# Altium PCB IntegroDiferencial_PCB.PcbDoc
Units mm, origin at the board's own origin, x right, y up, seen from the top; angles counter-clockwise.
Board outline 49.78 x 42.82 mm, 2 copper layers (Top Layer, Bottom Layer); 28 components, 14 nets, 64 pads, 0 vias.
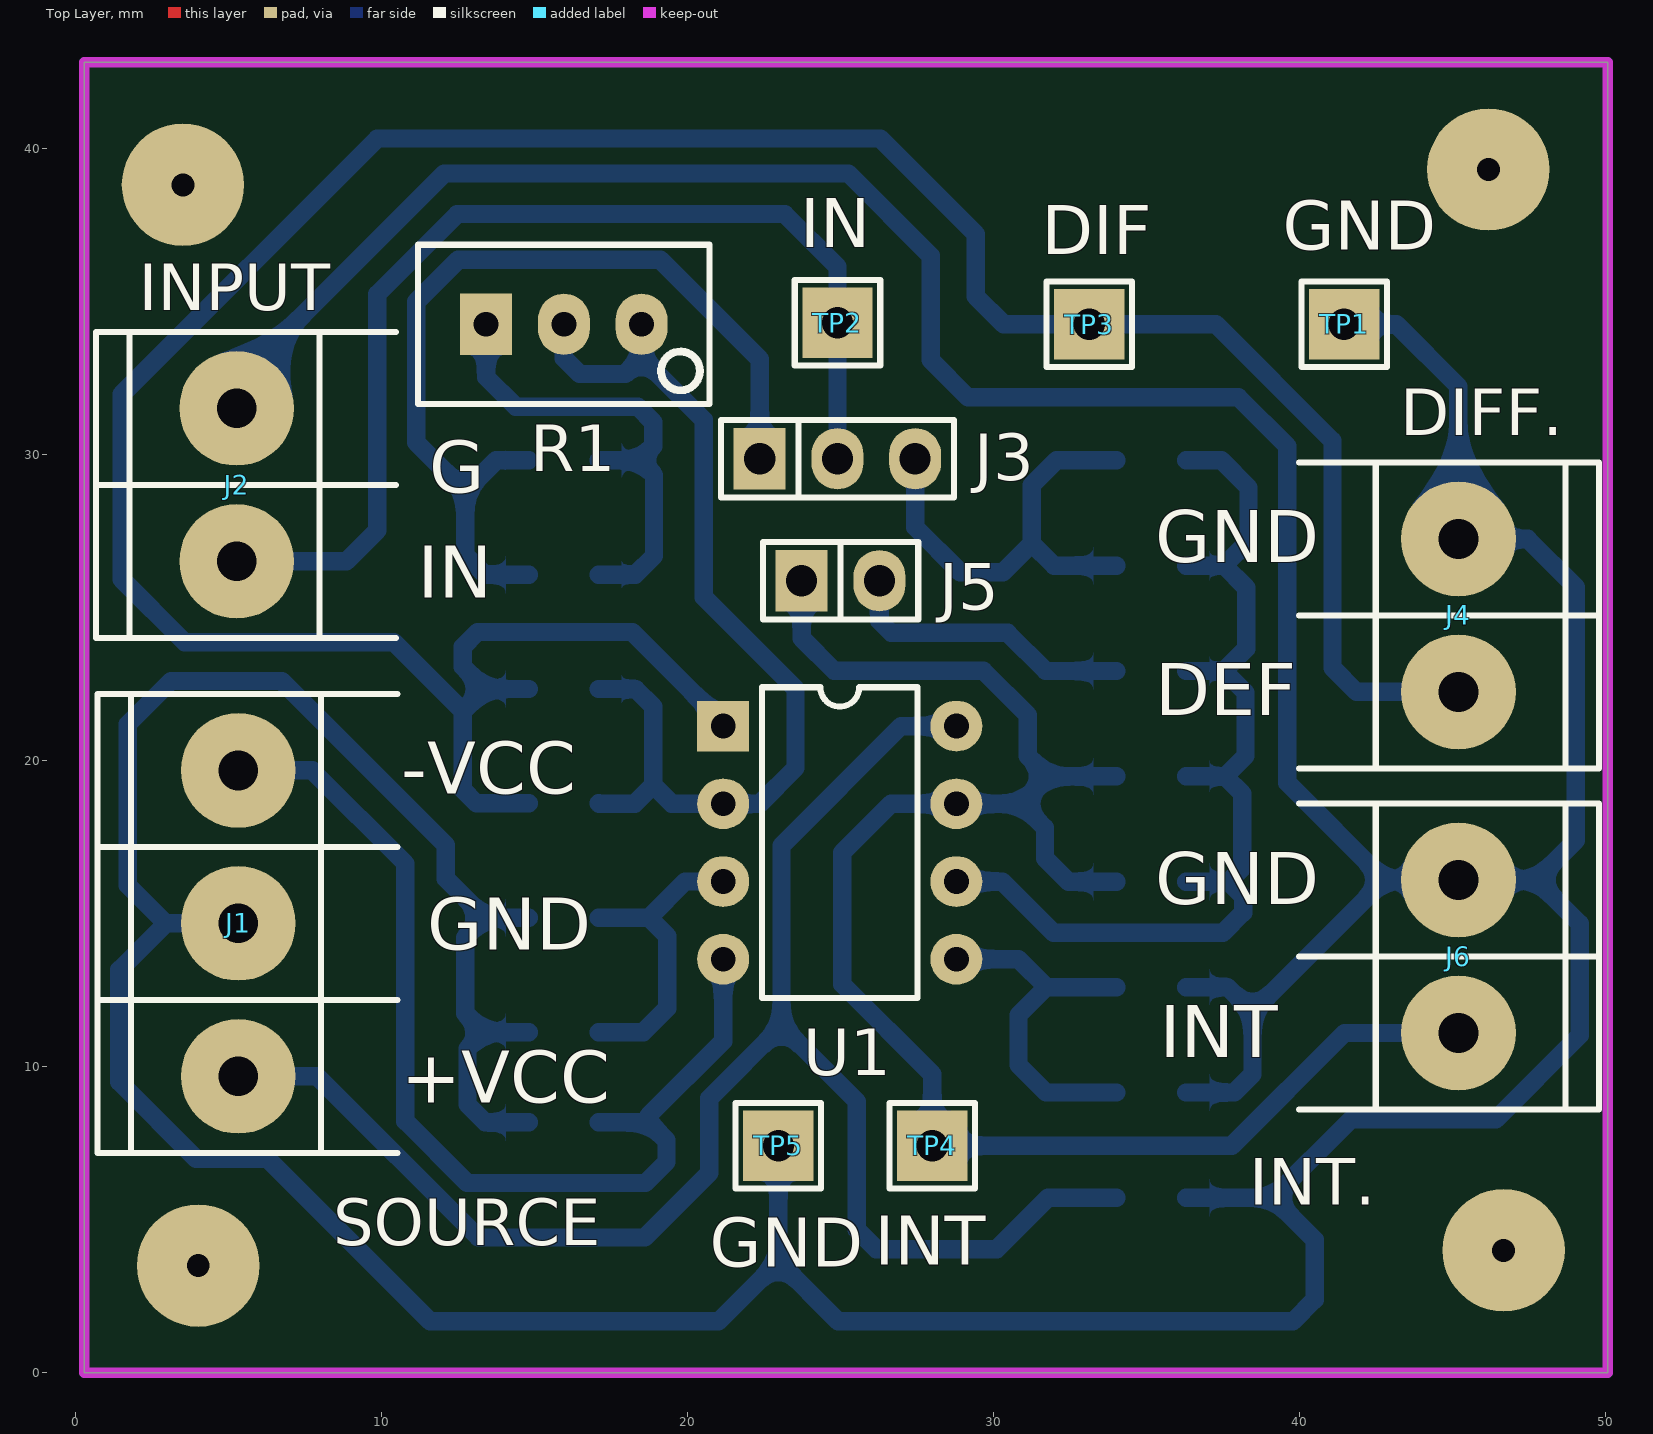
[diagram p0: Top Layer view]
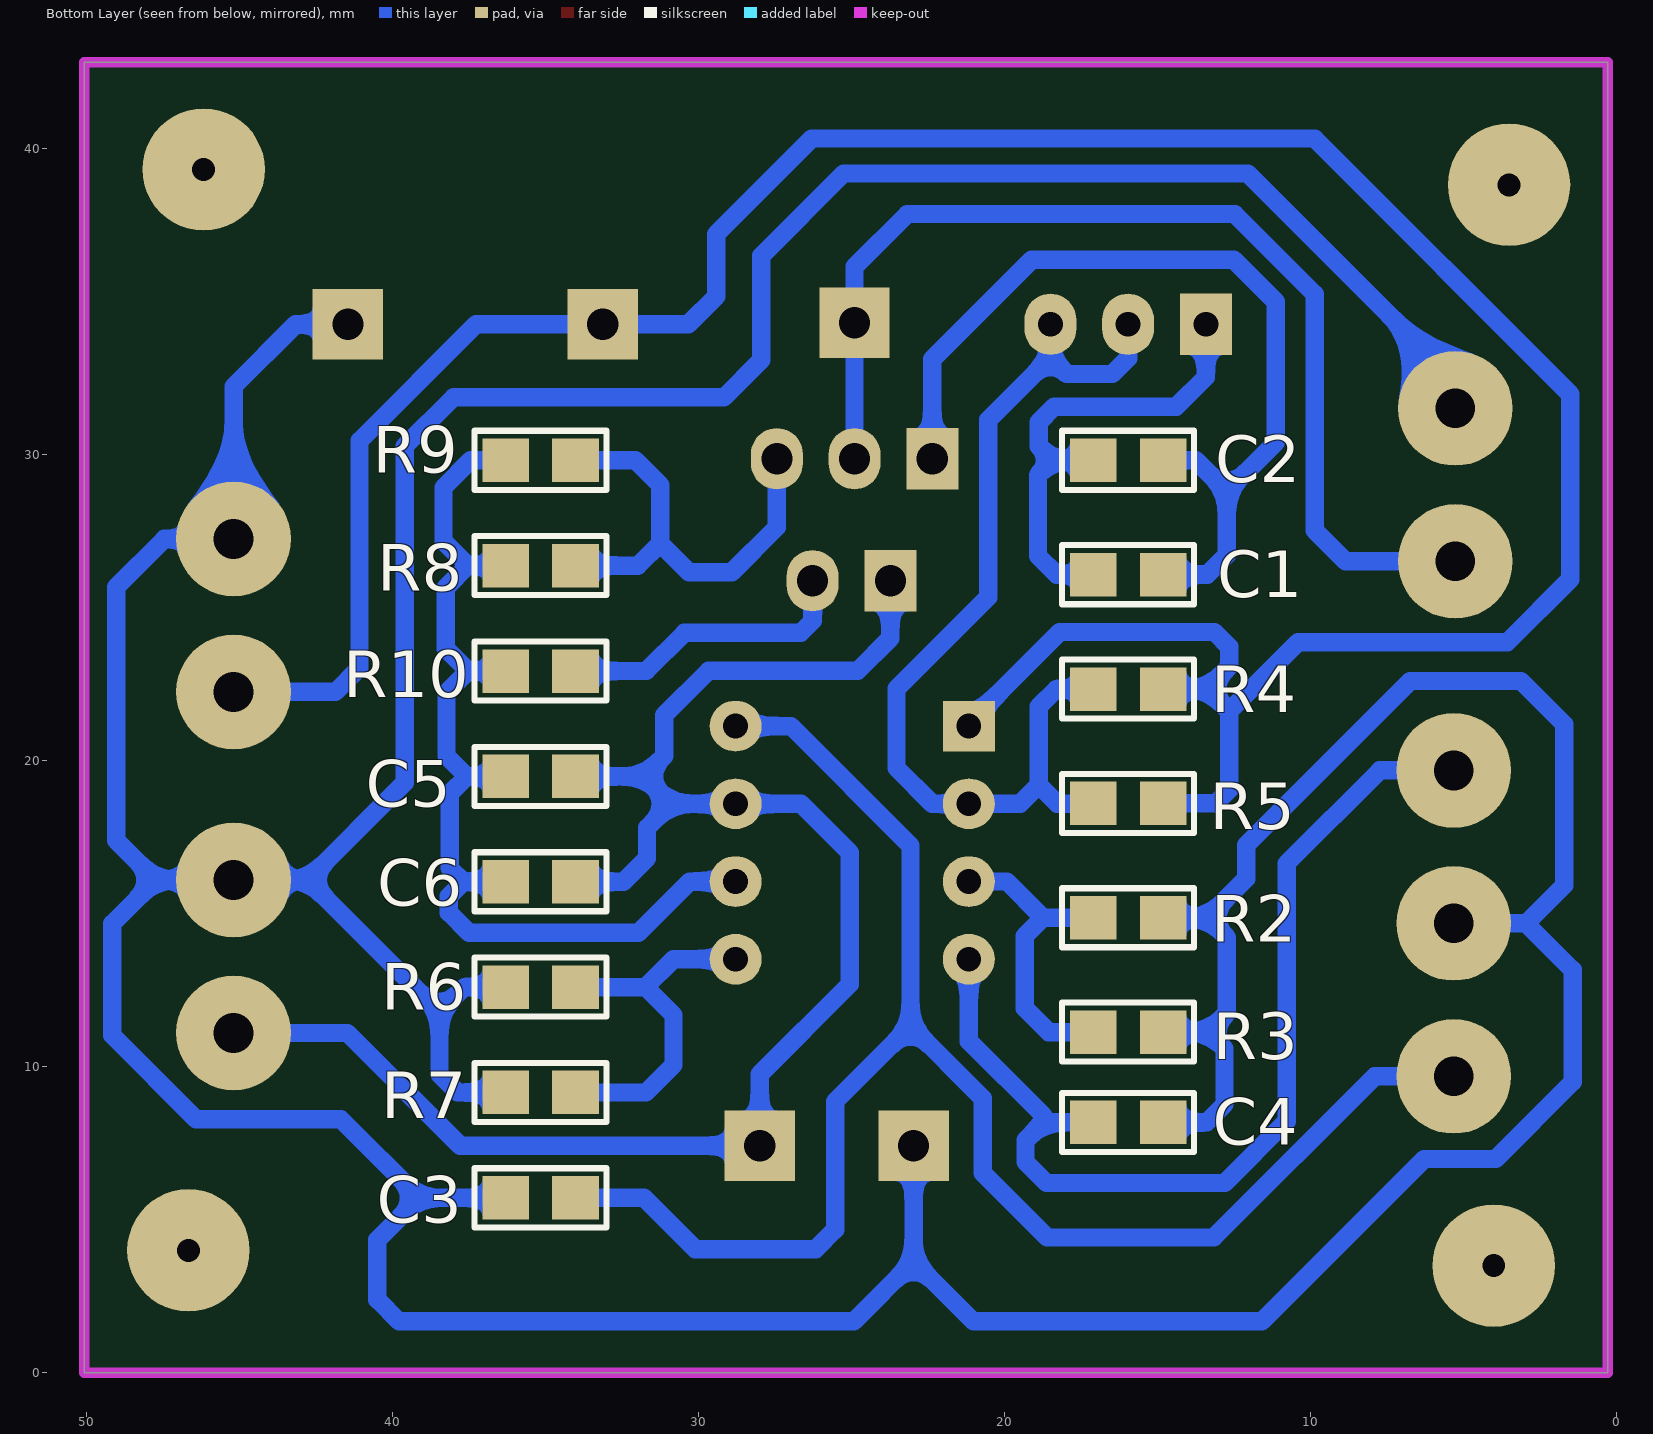
[diagram p1: Bottom Layer view, seen from below]
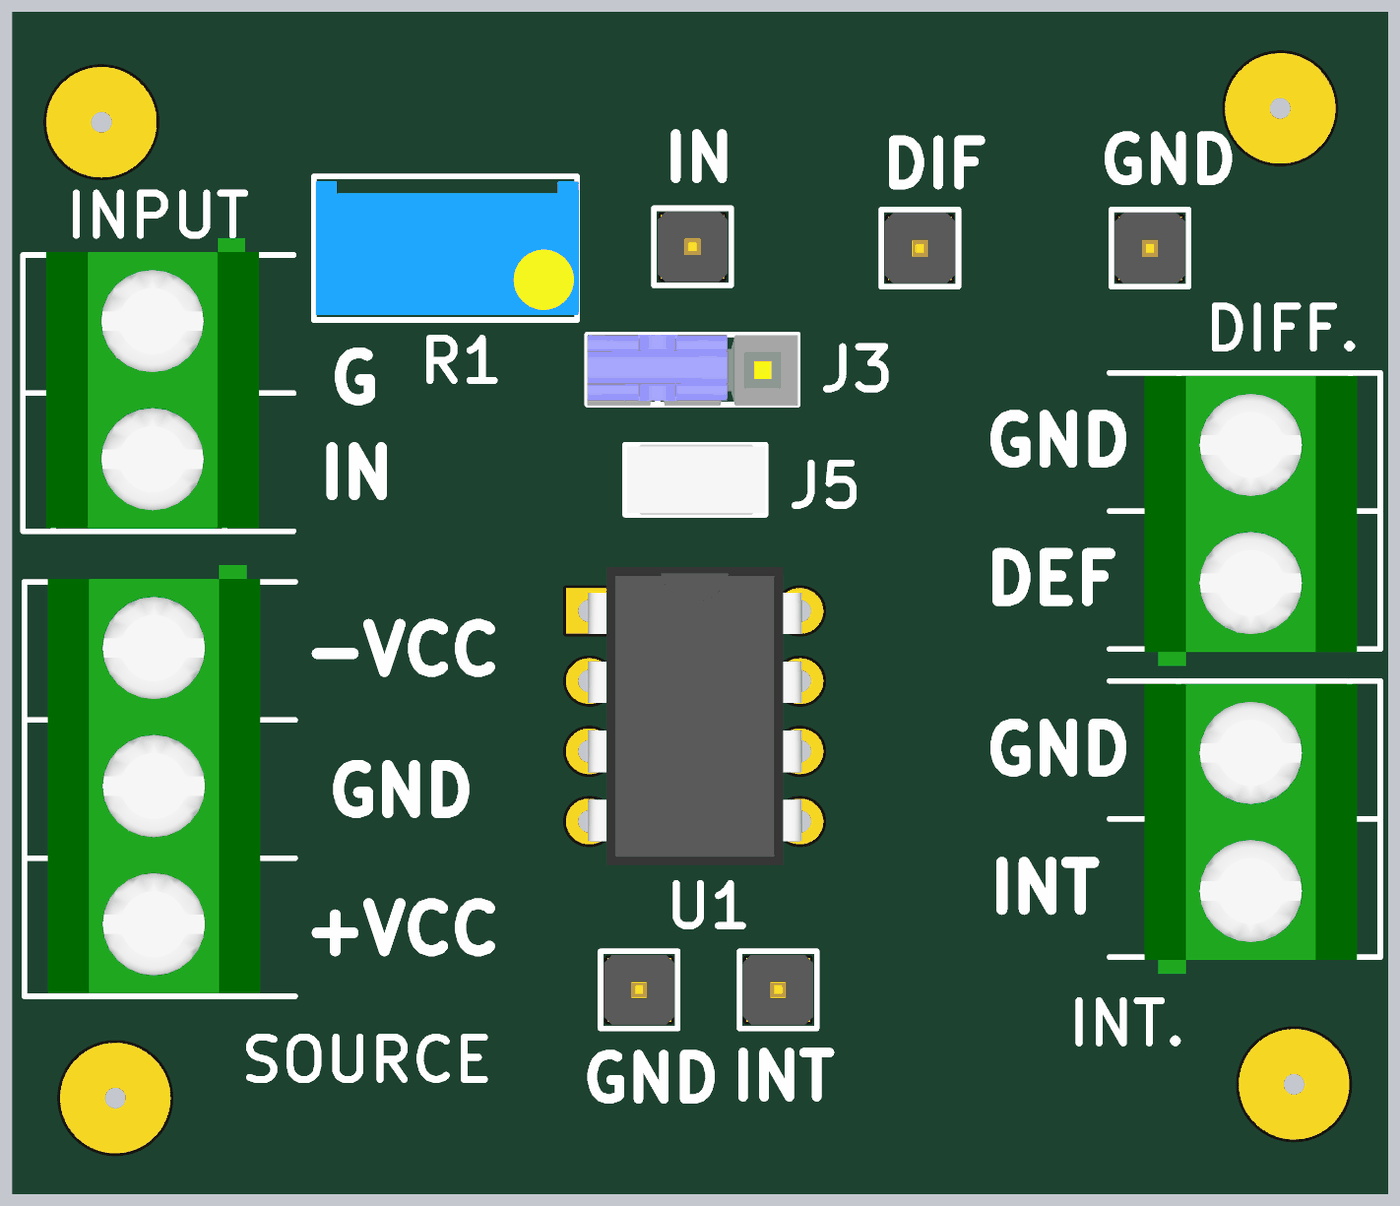
[diagram p2: 3D render of the assembled board from above, using the file's embedded part models]
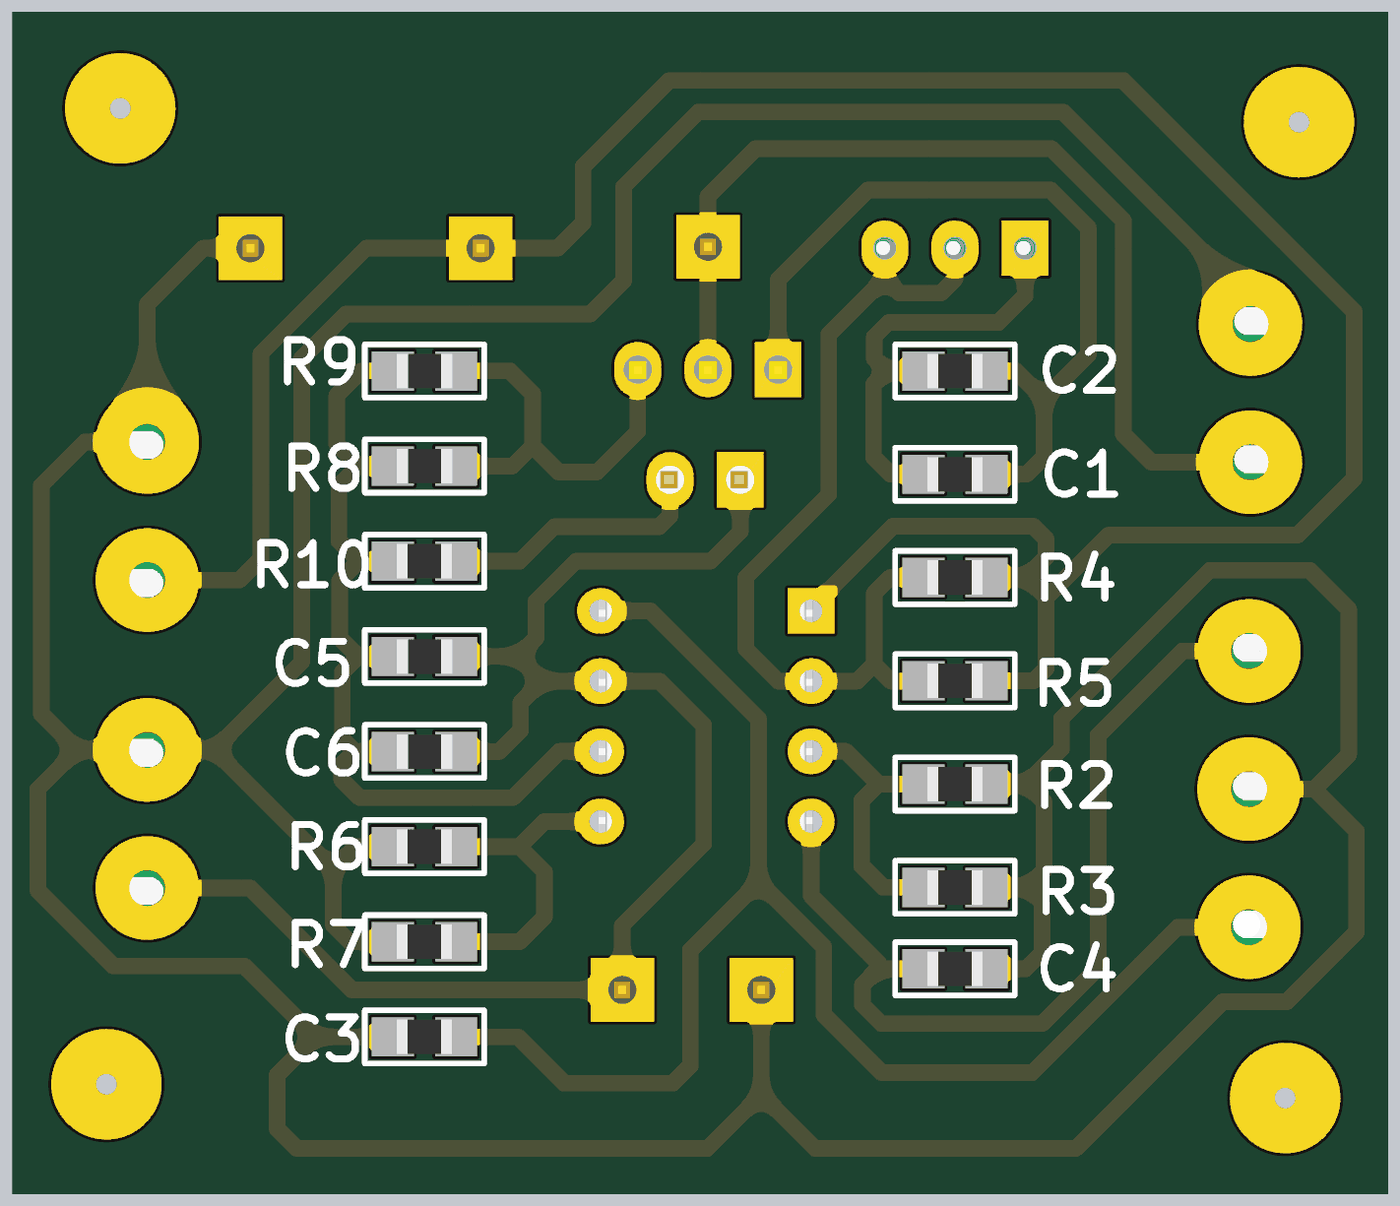
[diagram p3: 3D render of the assembled board from below, using the file's embedded part models]

## Layer stack, top to bottom
Top Solder: solder mask 0.0102, Solder Resist, Dk 3.5
Top Layer: signal copper 0.0356
Dielectric 1: dielectric 0.32, FR-4, Dk 4.8
Bottom Layer: signal copper 0.0356
Bottom Solder: solder mask 0.0102, Solder Resist, Dk 3.5

## Board outline
0.279,0 50.063,0 50.063,42.824 0.279,42.824

## Design rules (kind name [scope] priority, off if disabled: settings)
Clearance Polygon [InPolygon] p1: gap=1
Clearance [All] p2: gap=0.4
PolygonConnect [All] p1: connectstyle=Relief reliefconductorwidth=0.254 reliefentries=4 polygonreliefangle="90 Angle" airgapwidth=0.254
RoutingVias [All] p1: holewidth=0.711 width=1.27 viastyle="Through Hole" minholewidth=0.711 minwidth=1.27 maxholewidth=0.711 maxwidth=1.27
SolderMaskExpansion [All] p1: expansion=0.102
Width [All] p1: maxlimit=0.9 minlimit=0.6 preferedwidth=0.6
30 further rules are at their usual default settings.

## Components (designator, comment, footprint, x,y, rotation, side; value= is the part's Value field where it differs from the comment)
C1 "10nF" 0805 15.951,26.082 r0 bottom
C2 "10nF" 0805 15.951,29.82 r0 bottom
C3 "100nF" 0805 35.154,5.715 r180 bottom
C4 "100nF" 0805 15.951,8.179 r0 bottom
C5 "10nF" 0805 35.154,19.489 r0 bottom
C6 "10nF" 0805 35.154,16.046 r0 bottom
J1 "SOURCE" BORNERA3 5.309,14.685 r0 top
J2 "INPUT" BORNERA2 5.258,29.018 r0 top
J3 "SELECTION" JUMPER3 24.892,29.87 r0 top
J4 "DIFF." BORNERA2 45.187,24.75 r180 top
J5 "COMPENSATION" JUMPER2 24.994,25.883 r0 top
J6 "INT." BORNERA2 45.187,13.604 r180 top
R1 "PRESET 500R" "PRESET V" 15.951,34.265 r0 top
R2 "10kR" 0805 15.951,14.867 r0 bottom
R3 "10kR" 0805 15.951,11.129 r0 bottom
R4 "10kR" 0805 15.951,22.344 r0 bottom
R5 "10kR" 0805 15.951,18.605 r0 bottom
R6 "10kR" 0805 35.154,12.602 r180 bottom
R7 "10kR" 0805 35.154,9.159 r180 bottom
R8 "10kR" 0805 35.154,26.376 r0 bottom
R9 "10kR" 0805 35.154,29.82 r0 bottom
R10 "470kR" 0805 35.154,22.933 r180 bottom
TP1 "GND" TPTH 41.453,34.265 r0 top
TP2 "IN" TPTH 24.892,34.315 r0 top
TP3 "DIF" TPTH 33.122,34.265 r0 top
TP4 "INT" TPTH 27.991,7.417 r0 top
TP5 "GND" TPTH 22.962,7.417 r0 top
U1 "LM833" DIP8 21.158,21.133 r0 top

## Footprints (in the part's own frame and the unit in brackets; to place one, negate y for a bottom-side part, rotate by r counter-clockwise, add the part's x,y. Pads: shape width x height; smd on the part's side, far side on the other; paste and mask are expansions set on the pad)
0805 [mil] "Pasivo 0805"
  rect 60x56 smd: 1(-45,0) 2(45,0)
  silkscreen extent -85,-38 85,38, body extent -39,-25 39,25, height 15
BORNERA2 [mm] "Bornera con Tornillos 5mm separación"
  round 3.75 hole 1.3: 1(0,2.5) 2(0,-2.5)
  silkscreen extent -4.6,-5 5.2,5, body extent -3.76,-4.89 3.94,5.61, height 10
BORNERA3 [mm] "Bornera con Tornillos 5mm separación"
  round 3.75 hole 1.3: 1(0,5) 2(0,0) 3(0,-5)
  silkscreen extent -4.6,-7.5 5.2,7.5, body extent -3.76,-7.39 3.94,8.11, height 10.05
DIP8 [mm]
  rect 1.7x1.65 hole 0.813: 1(0,0)
  oval 1.7x1.65 hole 0.813: 2(0,-2.54) 3(0,-5.08) 4(0,-7.62) 5(7.62,-7.62) 6(7.62,-5.08) 7(7.62,-2.54) 8(7.62,0)
  silkscreen extent 1.27,-8.89 6.35,1.27, body extent -0.06,-9.21 7.7,1.59, height 4.5
JUMPER2 [mm]
  rect 1.7x2 hole 1.016: 1(-1.27,0)
  oval 1.7x2 hole 1.016: 2(1.27,0)
  silkscreen extent -2.54,-1.27 2.54,1.27, body extent -2.46,-1.27 2.54,1.27, height 9.5
JUMPER3 [mm]
  rect 1.7x2 hole 1.016: 1(-2.54,0)
  oval 1.7x2 hole 1.016: 2(0,0) 3(2.54,0)
  silkscreen extent -3.81,-1.27 3.81,1.27, body extent -3.81,-1.3 3.81,1.27, height 16.15
"PRESET V" [mm]
  rect 1.7x2 hole 0.813: 1(-2.54,0)
  oval 1.7x2 hole 0.813: 2(0,0) 3(2.54,0)
  silkscreen extent -4.76,-2.6 4.76,2.6, body extent -4.7,-2.42 4.83,2.42, height 11.55
TPTH [mm]
  rect 2.3x2.3 hole 1.016: 1(0,0)
  silkscreen extent -1.4,-1.4 1.4,1.4, body extent -1.27,-1.27 1.27,1.27, height 6.04

## Part data
C1 C2 C5 C6: library part CAP, "CAP 10nF 0805"
C3 C4: library part CAP, "CAP 100nF 0805"
J1: library part "BORNERA 3", "BORNERA 3"
J2 J4 J6: library part "BORNERA 2", "BORNERA 2"
J3: library part JUMPER3, "JUMPER"
J5: library part JUMPER, "JUMPER"
R1: library part PRESET
R2 R3 R4 R5 R6 R7 R8 R9: library part RES, "RES 10kR 0805"
R10: library part RES, "RES 470kR 0805"
TP1 TP2 TP3 TP4 TP5: library part TP
U1: "Dual Audio Operational Amplifier"

## Free pads (board coordinates)
  round 4 hole 0.75: 2(3.5,38.824) 2(4,3.5) 2(46.165,39.324) 2(46.665,4)

## Nets (pads, with @x,y where several pads share a name; then routed paths per layer and width w, separated by ;. In a path a pad name is that pad's centre, name@x,y a point inside that pad or via, vN(x,y) a via of type N, cw(c..) or ccw(c..) an arc to the next point about the centre after c; other vN are vias at no path point)
DIFFERENTIATOR_INPUT: C1.1 C2.1 J3.1 | length 30.2
  Bottom Layer w0.6: C1.1 13.365,26.082 12.725,26.721 12.725,28.804 ; C2.1 13.741,29.82 12.725,28.804 ; J3.1 22.352,33.122 19.101,36.373 12.497,36.373 11.125,35.001 11.125,30.404 12.725,28.804
GND: C3.1 C4.1 J1.2 J2.1 J4.2 J6.2 R2.1 R3.1 R6.1 R7.1 TP1.1 TP5.1 | length 217.3
  Bottom Layer w0.6: J2.1 5.258,32.41 12.04,39.192 25.248,39.192 27.94,36.5 27.94,33.096 29.159,31.877 37.998,31.877 39.599,30.277 39.599,19.279 42.774,16.104 ; J1.2 2.943,14.685 ; C4.1 13.386,8.179 12.802,8.763 12.802,10.592 13.339,11.129 ; R3.1 13.339,11.129 ; R2.1 13.369,14.867 ; TP5.1 22.962,3.632 ; C3.1 39.116,5.715 ; R7.1 37.861,9.159 38.456,9.754 38.456,11.786 ; R6.1 37.639,12.602 38.456,11.786 ; TP1.1 43.155,34.265 45.187,32.233 J4.2 47.451,27.25 49.022,25.679 49.022,17.399 47.727,16.104 ; 2.943,14.685 1.702,15.926 1.702,21.195 3.113,22.606 6.731,22.606 12.09,17.247 12.09,16.146 13.369,14.867 ; 2.943,14.685 1.422,13.165 1.422,9.5 3.937,6.985 6.274,6.985 11.582,1.676 21.006,1.676 22.962,3.632 ; 13.339,11.129 12.725,11.743 12.725,14.224 13.369,14.867 ; 22.962,3.632 24.917,1.676 39.776,1.676 40.488,2.388 40.488,4.343 39.116,5.715 ; 38.456,11.786 42.774,16.104 ; 39.116,5.715 41.681,8.28 46.406,8.28 49.149,11.024 49.149,14.681 47.727,16.104 ; 42.774,16.104 J6.2 47.727,16.104
INPUT_SIGNAL: J2.2 J3.2 TP2.1 | length 35.8
  Bottom Layer w0.6: J2.2 8.839,26.518 9.855,27.534 9.855,35.255 12.471,37.871 23.165,37.871 24.892,36.144 TP2.1 J3.2
INTEGRATOR_INPUT: J3.3 R8.1 R9.1 | length 15.1
  Bottom Layer w0.6: J3.3 27.432,27.635 28.905,26.162 30.302,26.162 31.242,27.102 ; R8.1 31.968,26.376 31.242,27.102 ; R9.1 32.055,29.82 31.242,29.007 31.242,27.102
NetC1_2: C1.2 C2.2 R1.1 | length 15.9
  Bottom Layer w0.6: R1.1 13.411,32.537 14.376,31.572 18.364,31.572 18.872,31.064 18.872,30.277 18.415,29.82 ; C1.2 18.284,26.082 18.898,26.695 18.898,29.337 18.415,29.82 ; C2.2 18.415,29.82
NetC5_2: C5.2 C6.2 R8.2 R9.2 R10.1 U1.6 | length 33.9
  Bottom Layer w0.6: U1.6 30.277,16.053 31.953,14.376 37.49,14.376 38.151,15.037 38.151,15.57 37.675,16.046 ; C6.2 37.675,16.046 ; C5.2 37.559,19.489 ; R10.1 37.519,22.933 ; R8.2 37.53,26.376 ; R9.2 37.44,29.82 38.329,28.931 38.329,27.174 37.53,26.376 ; 37.519,22.933 38.252,23.666 38.252,25.654 37.53,26.376 ; 37.519,22.933 38.227,22.225 38.227,20.157 37.559,19.489 ; 37.559,19.489 38.125,18.923 38.125,16.495 37.675,16.046
NetJ5_2: J5.2 R10.2 | length 9.7
  Bottom Layer w0.6: J5.2 26.264,24.571 26.654,24.181 30.455,24.181 31.703,22.933 R10.2
NetR1_2: R1.2 R1.3 R4.2 R5.2 U1.2 | length 32.7
  Bottom Layer w0.6: R1.2 15.951,33.156 16.469,32.639 17.958,32.639 18.491,33.172 ; R5.2 17.107,18.593 18.263,18.593 18.872,19.202 ; R4.2 18.296,22.344 18.872,21.768 18.872,19.202 ; R1.3 18.491,33.172 ; 18.491,33.172 20.523,31.14 20.523,25.349 23.52,22.352 23.52,19.761 22.352,18.593 U1.2 19.482,18.593 18.872,19.202
NetR2_2: R2.2 R3.2 U1.3 | length 10.3
  Bottom Layer w0.6: R3.2 18.546,11.129 19.329,11.913 19.329,14.266 18.728,14.867 ; R2.2 18.728,14.867 ; U1.3 19.914,16.053 18.728,14.867
NetR6_2: R6.2 R7.2 U1.5 | length 12.1
  Bottom Layer w0.6: U1.5 30.81,13.513 31.721,12.602 ; R7.2 31.71,9.159 30.81,10.058 30.81,11.691 31.721,12.602 ; R6.2 31.721,12.602
OUTPUT_DIFFERENTIATOR: J4.1 R4.1 R5.1 TP3.1 U1.1 | length 98.3
  Bottom Layer w0.6: R5.1 13.094,18.605 12.649,19.05 12.649,21.615 ; R4.1 13.377,22.344 ; U1.1 21.158,21.234 18.186,24.206 13.132,24.206 12.649,23.724 12.649,23.072 13.377,22.344 ; J4.1 41.859,22.25 41.072,23.038 41.072,30.455 37.262,34.265 TP3.1 30.328,34.265 29.413,35.179 29.413,37.211 26.289,40.335 9.855,40.335 1.499,31.979 1.499,25.933 3.556,23.876 10.389,23.876 12.649,21.615 ; 12.649,21.615 13.377,22.344
OUTPUT_INTEGRATOR: C5.1 C6.1 J5.1 J6.1 TP4.1 U1.7 | length 56.9
  Bottom Layer w0.6: J5.1 23.724,24.003 24.79,22.936 29.667,22.936 31.115,21.488 31.115,20.157 31.783,19.489 ; C6.1 32.443,16.046 31.674,16.815 31.674,17.805 30.886,18.593 ; C5.1 31.783,19.489 ; J6.1 41.465,11.104 37.778,7.417 TP4.1 27.991,9.754 25.044,12.7 25.044,16.993 26.645,18.593 U1.7 30.886,18.593 ; 30.886,18.593 31.783,19.489
VCC: C3.2 J1.3 U1.8 | length 54.6
  Bottom Layer w0.6: J1.3 7.892,9.685 13.157,4.42 18.593,4.42 20.701,6.528 20.701,8.966 23.063,11.328 ; U1.8 26.975,21.133 23.063,17.221 23.063,11.328 ; C3.2 31.775,5.715 30.099,4.039 26.162,4.039 25.527,4.674 25.527,8.865 23.063,11.328
VEE: C4.2 J1.1 U1.4 | length 34.3
  Bottom Layer w0.6: J1.1 7.722,19.685 10.77,16.637 10.77,8.221 12.793,6.198 18.618,6.198 19.304,6.883 19.304,7.595 18.72,8.179 ; C4.2 18.72,8.179 ; U1.4 21.158,10.838 18.72,8.399 18.72,8.179

## Keep-outs
Keep-Out Layer:
  the board outline again, w0.35

## Silkscreen, mask and mechanical layers (free items; w line width, h text height)
Top Overlay:
  text "G" at 11.557,28.753 h1.7
  text "GND" at 35.281,26.492 h1.7
  text "IN" at 11.176,25.324 h1.7
  text "DEF" at 35.281,21.488 h1.7
  text "-VCC" at 10.643,18.923 h1.7
  text "GND" at 35.281,15.316 h1.7
  text "GND" at 11.492,13.818 h1.7
  text "INT" at 35.422,10.312 h1.7
  text "+VCC" at 10.643,8.814 h1.7